# Altium PCB Project-PCB.PcbDoc
Units mm, origin at the board's own origin, x right, y up, seen from the top; angles counter-clockwise.
Board outline 100.33 x 75.18 mm, 2 copper layers (Top Layer, Bottom Layer), stack 1.59 mm thick; 14 components, 10 nets, 35 pads, 3 vias.
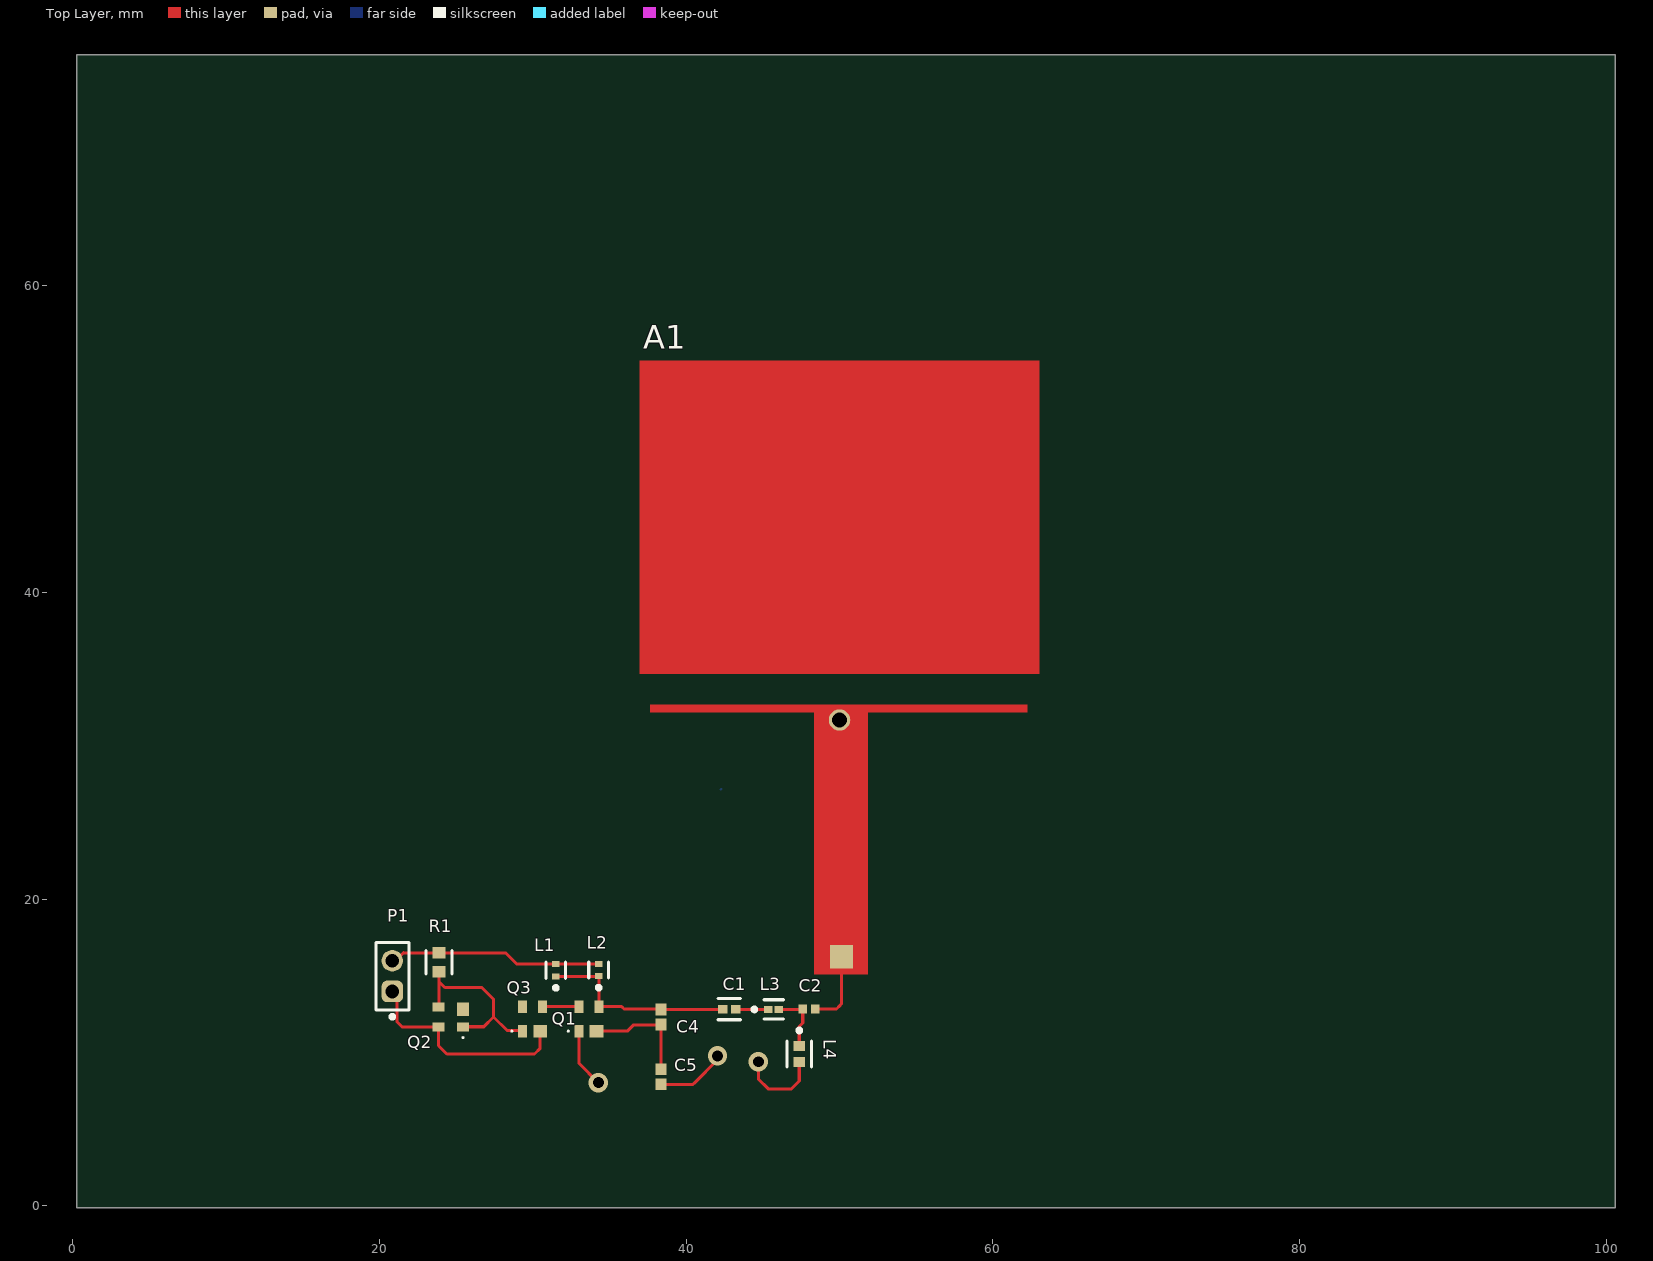
[diagram p0: Top Layer view]
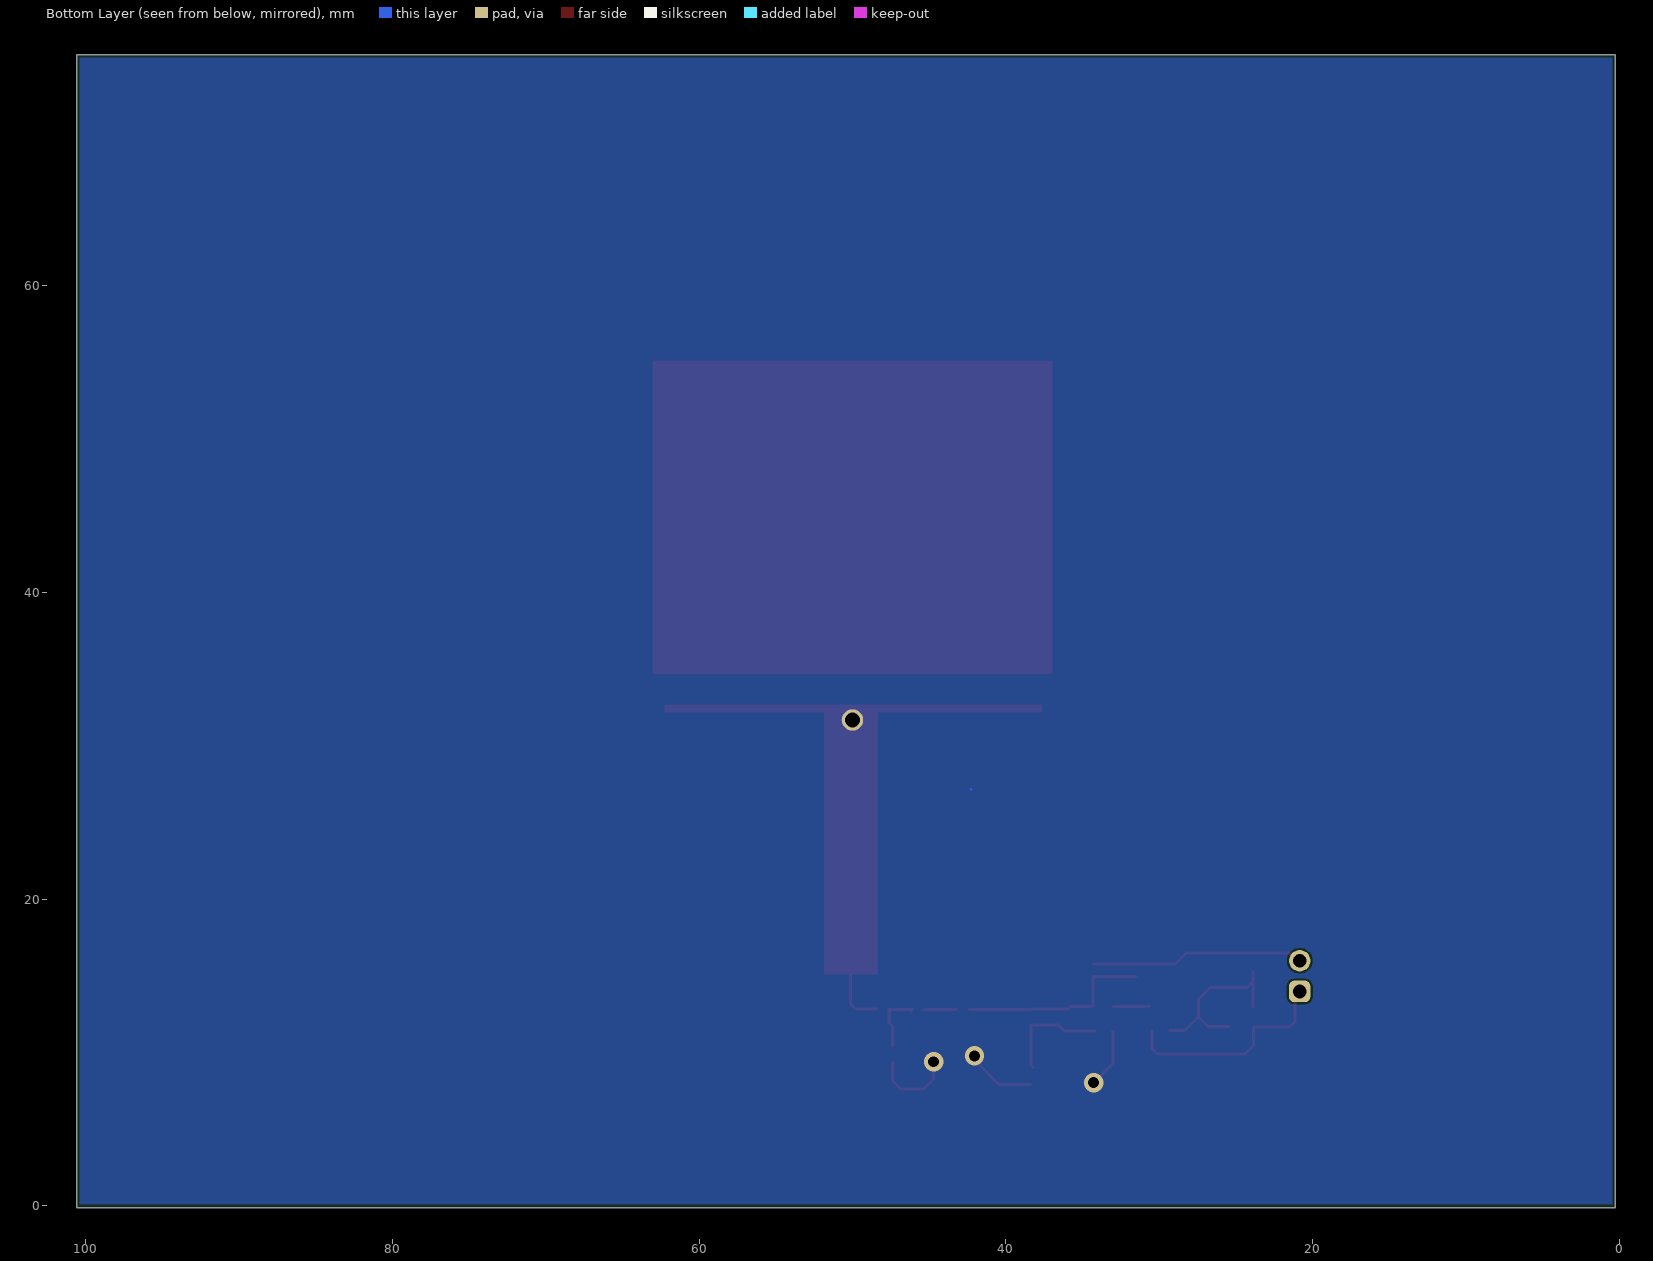
[diagram p1: Bottom Layer view, seen from below]
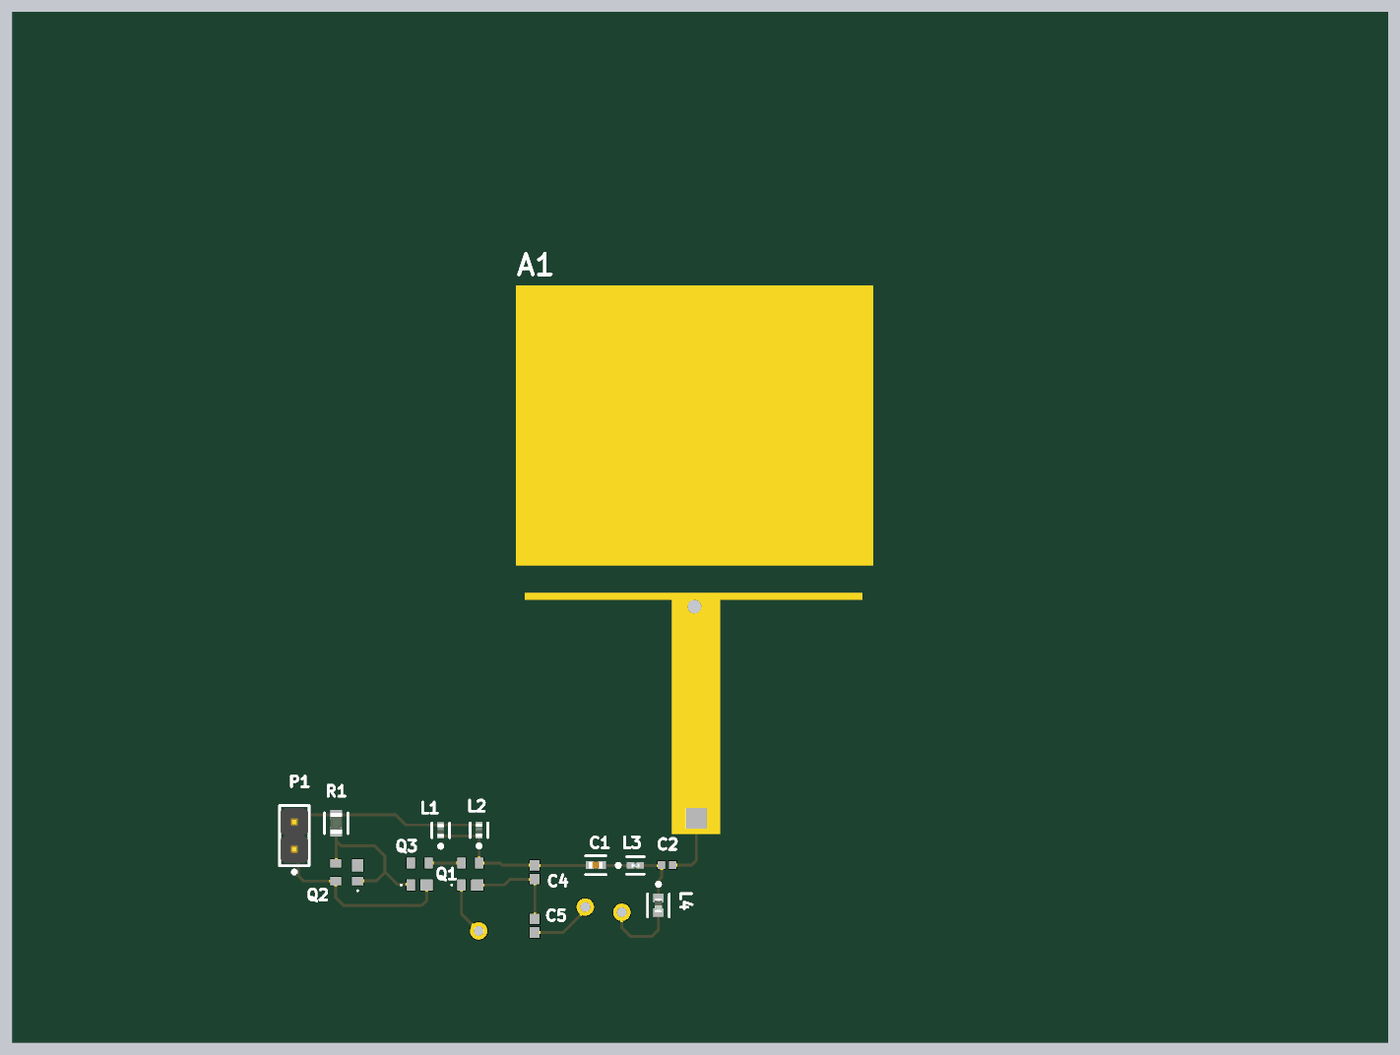
[diagram p2: 3D render of the assembled board from above, using the file's embedded part models]

## Layer stack, top to bottom
Top Solder: solder mask 0.0102, Solder Resist, Dk 3.5
Top Layer: signal copper 0.035
Dielectric 1: dielectric 1.52, RO4350B, Dk 4.8
Bottom Layer: signal copper 0.035
Bottom Solder: solder mask 0.0102, Solder Resist, Dk 3.5

## Board outline
0.254,-0.127 100.584,-0.127 100.584,75.057 0.254,75.057

## Design rules (kind name [scope] priority, off if disabled: settings)
BoardOutlineClearance [All] p1: gap=0.2 ignorepadtopadclearanceinfootprint=FALSE
Clearance [All] p1: gap=0.127 ignorepadtopadclearanceinfootprint=FALSE except(0.25: Arc-Hole Track-Hole SMDPad-Hole THPad-Hole Via-Hole Fill-Hole Poly-Hole Region-Hole Text-Hole)
ComponentClearance [All] p1: gap=0.127 collisioncheckmode=3 verticalgap=0.127 showdistances=TRUE
DiffPairsRouting [All] p1: maxlimit=0.254 minlimit=0.127 mostfreqgap=0.127 toplayer_minwidth=0.127 toplayer_maxwidth=25.4 toplayer_prefwidth=0.127 bottomlayer_minwidth=0.127 bottomlayer_maxwidth=25.4 bottomlayer_prefwidth=0.127 maxuncoupledlength=12.7
Height [All] p1: minheight=0 maxheight=1816.048 prefheight=12.7
HoleSize [All] p1: absolutevalues=TRUE maxlimit=6.3 minlimit=0.3 maxpercent=80.000 minpercent=20.000
HoleToHoleClearance [All] p1: gap=0.25 allowstackedmicrovias=FALSE
MinimumAnnularRing [All] p1: minimumring=0.076
MinimumSolderMaskSliver [All] p1: minsoldermaskwidth=0
PlaneClearance [All] p1: clearance=0.127
PlaneConnect PlaneConnectPowerPads [InPadClass('PowerPads')] p1: planeconnectstyle=Direct reliefexpansion=0.508 reliefentries=4 reliefconductorwidth=0.254 reliefairgap=0.254
PlaneConnect [All] p2: pad.planeconnectstyle=Relief pad.reliefexpansion=0.3 pad.reliefentries=4 pad.reliefconductorwidth=0.127 pad.reliefairgap=0.127 via.planeconnectstyle=Direct via.reliefexpansion=0.3 via.reliefentries=4 via.reliefconductorwidth=0.127 via.reliefairgap=0.127
PolygonConnect PolygonConnectPowerPads [All vs (InPadClass('PowerPads'))] p1: connectstyle=Direct reliefconductorwidth=0.254 reliefentries=4 polygonreliefangle="90 Angle" airgapwidth=0.254
PolygonConnect [All] p2: connectstyle=Direct reliefconductorwidth=0.127 reliefentries=4 polygonreliefangle="90 Angle" airgapwidth=0.127
RoutingVias [All] p1: holewidth=0.3 width=0.6 viastyle="Through Hole" minholewidth=0.3 minwidth=0.6 maxholewidth=0.6 maxwidth=6.6
SilkToSilkClearance [All] p1: silktosilkclearance=0
SilkToSolderMaskClearance [IsPad] p1: minsilkscreentomaskgap=0.127 clearancetoexposedcopper=TRUE
SolderMaskExpansion [All] p1: expansion=0.075 istentingtop=FALSE
SupplyNets "Schematic Supply Nets_2" [InNet('GND')] p1: voltage=0.000
SupplyNets "Schematic Supply Nets_1" [InNet('Vcc')] p2: voltage=0.000
SupplyNets "Schematic Supply Nets" [InNet('Vee')] p3: voltage=0.000
Width [All] p1: maxlimit=25.4 minlimit=0.127 preferedwidth=0.127 minimp=50.000000 maximp=50.000000 favimp=50.000000
20 further rules are at their usual default settings.

## Components (designator, comment, footprint, x,y, rotation, side; value= is the part's Value field where it differs from the comment)
A1 "CustomAntenna" CustomAntennaFootprint 50,44.942 r0 top net-tie
C1 "GRM1555C1H102FA01D" FP-GRM155-0_05-IPC_B 42.799,12.812 r0 top
C2 "04023J0R2PBSTR" CAPC1006X50X20LL10T10 48.006,12.827 r0 top
C4 "GRM1555C1H3R4WA01D" CAPC1005X55X25ML05T10 38.354,12.304 r90 top
C5 "GRM1555C1H3R4WA01D" CAPC1005X55X25ML05T10 38.354,8.4 r90 top
L1 "LQG15HN2N0B02D" FP-LQG15HH_02-MFG 31.496,15.352 r90 top
L2 "LQG15HN2N0B02D" FP-LQG15HH_02-MFG 34.29,15.367 r90 top
L3 "LQP03TN2N0B02D" FP-LQP03TG_02-IPC_A 45.693,12.798 r0 top
L4 "LQG15WZ10NG02D" FP-LQG15WH_02-IPC_A 47.371,9.891 r270 top
P1 "62000211121" 62000211121 20.828,14.971 r90 top
Q1 "BFP520" INF-SOT343_V 33.655,12.177 r90 top
Q2 "BFP520" INF-SOT343_V 24.638,12.304 r180 top
Q3 "BFP520" INF-SOT343_V 29.972,12.177 r90 top
R1 "CRCW06035K10FKEA" FP-CRCW0603-e3-IPC_C 23.876,15.875 r270 top

## Footprints (in the part's own frame and the unit in brackets; to place one, negate y for a bottom-side part, rotate by r counter-clockwise, add the part's x,y. Pads: shape width x height; smd on the part's side, far side on the other; paste and mask are expansions set on the pad)
62000211121 [mm] "Pin Header, pitch 2.00 mm, THT, Vertical, single row, 2p"
  rrect50% 1.4x1.4 hole 0.9: 1(-1,0)
  round 1.4 hole 0.9: 2(1,0)
  silkscreen extent -2.77,-1.07 2.2,1.07, body extent -2,-1 2,1, height 6.05
CAPC1005X55X25ML05T10 [mm] "Chip Capacitor, 2-Leads, Body 1.00x0.50mm, IPC Low Density"
  rect 0.76x0.72 smd: 1(-0.49,0) 2(0.49,0)
  body extent -0.53,-0.28 0.53,0.27, height 0.55
CAPC1006X50X20LL10T10 [mm] "Chip Capacitor, 2-Leads, Body 1.00x0.55mm, IPC High Density"
  rect 0.54x0.6 smd: 1(-0.41,0) 2(0.41,0)
  body extent -0.55,-0.33 0.55,0.33, height 0.5
CustomAntennaFootprint [mil]
  rect 60x60 smd: 1(5,-1130)
  round 60 on Top Solder: 1(5,-1130)
  round 55.12 hole 39.37: GND(0,-522.32)
  Top Layer region: -513.32,-404.22 513.33,-404.22 513.33,400.45 -513.32,400.45
  Top Layer region: -486.54,-502.65 482.01,-502.65 482.01,-482.96 -486.54,-482.96
  Top Layer region: 73.53,-1175.32 73.53,-488.77 -65.44,-488.77 -65.44,-1175.32
FP-CRCW0603-e3-IPC_C [mm]
  rect 0.735x0.862 smd paste+0 mask+0: 1(-0.615,0) 2(0.615,0)
  silkscreen extent -0.75,-0.85 0.75,0.85, body extent -1.08,-0.58 1.08,0.58, height 0.25
FP-GRM155-0_05-IPC_B [mm]
  rect 0.615x0.572 smd paste+0 mask+0: 1(-0.429,0) 2(0.429,0)
  silkscreen extent -0.74,-0.69 0.74,0.69, body extent -0.89,-0.44 0.89,0.44, height 0.25
FP-LQG15HH_02-MFG [mm]
  rect 0.4x0.5 smd paste+0 mask+0: 1(-0.4,0) 2(0.4,0)
  silkscreen extent -1.27,-0.64 0.53,0.65, body extent -0.7,-0.38 0.7,0.38, height 0.25
FP-LQG15WH_02-IPC_A [mm]
  rect 0.627x0.772 smd paste+0 mask+0: 1(-0.523,0) 2(0.523,0)
  silkscreen extent -1.66,-0.79 0.84,0.79, body extent -1.04,-0.59 1.04,0.59, height 0.25
FP-LQP03TG_02-IPC_A [mm]
  rect 0.554x0.463 smd paste+0 mask+0: 1(-0.354,0) 2(0.354,0)
  silkscreen extent -1.37,-0.63 0.63,0.63, body extent -0.83,-0.43 0.83,0.43, height 0.25
INF-SOT343_V [mm] "SOT343, 4-Leads, Body 2x1.25 mm"
  rect 0.8x0.6 smd: 1(-0.8,0.65) 3(0.8,-0.65) 4(0.8,0.65)
  rect 0.8x0.9 smd: 2(-0.8,-0.5)
  silkscreen extent -0.85,1.3 -0.75,1.4, body extent -0.63,-1 0.63,1, height 1

## Part data
A1: "Custom Antenna from CST"
C1: library part CMP-06035-003843-1, "Chip Multilayer Ceramic Capacitors for General Purpose, 0402, 1000pF, C0G, 30ppm/°C, 1%, 50V", Capacitance=1nF, Case Code (Imperial)=0402, Case Code (Metric)=1005, Dielectric=C0G, Max Operating Temperature=125°C, Min Operating Temperature=-55°C, Package Quantity=1, Tolerance=1%, Voltage=50V, Case/Package=0402, Depth=0.5mm, Height=0.5mm, Lead Free="Lead Free", Length=1mm, Material=Ceramic, Mount="Surface Mount", Packaging="Tape and Reel", Radiation Hardening=No, REACH SVHC="No SVHC", Termination=SMD/SMT, Thickness=0.022inch, Voltage Rating=50V, Voltage Rating (DC)=50V, Width=0.02inch
C2: library part CMP-2008-04702-1, Manufacturer="AVX Interconnect / Elco", Part Number=04023J0R2PBSTR
C4 C5: library part CMP-1034-00271-2, Manufacturer=Murata, Part Number=GRM1555C1H3R4WA01D
L1 L2: library part CMP-06042-001124-1, "Multilayer type RF Inductor 2nH ±0.1nH 0.09Ω 900mA 0402"
L3: library part CMP-06042-013297-1, "Film type RF Inductor 2nH ±0.1nH 600mA 0.15Ω 0201 (0603)", Case Code (Imperial)=0201, Case Code (Metric)=0603, Current=400mA, Current Rating=600mA, DC Resistance (DCR)=150mR, Inductance=2nH, Max Operating Temperature=125°C, Min Operating Temperature=-55°C, Package Quantity=15000, Resistor Type="Thin Film", Self Resonant Frequency=12.5GHz, Test Frequency=500MHz, Case/Package=0201, Core Material=Non-Magnetic, DC Current=600mA, Depth=0.33mm, Height=0.3mm, Height - Seated (Max)=0.013inch, Length=0.6mm, Max DC Current=600mA, Military Standard=Not, Mount="Surface Mount", Packaging="Tape and Reel", Q Factor=14, REACH SVHC="No SVHC", Shielding=Unshielded, Termination=SMD/SMT, Width=0.012inch
L4: library part CMP-06042-006093-1, "Multilayer type Inductor for Automotive 10nH ±2% 0.19Ω 500mA 0402"
P1: library part CMP-1502-00956-4, Contact Resistance=20mΩ, Current Rating=2A, Max Operating Temperature=105°C, Min Operating Temperature=-40°C, Operating Supply Voltage=200V, Contact Material=Gold, Gender=Male, Height=6.35mm, Lead Pitch=2mm, NexarPartId=61924778, Number of Contacts=2, Number of Pins=2, Number of Rows=1, Orientation=Vertical, RoHS=Non-Compliant, Voltage Rating=200V
Q1 Q2 Q3: library part CMP-1202-00001-1, "NPN Silicon RF Transistor, 2.5 V VCEO, 40 mA IC, 23.5 dB Gmax, SOT343, Green", Manufacturer=Infineon, ComponentLink1Description="Manufacturer URL", ComponentLink1URL=http://www.infineon.com/, ComponentLink2Description=Datasheet, ComponentLink2URL=http://www.infineon.com/dgdl/bfp520.pdf?folderId=db3a30431400ef68011425b291f205c5&fileId=db3a30431400ef680114275a86cd0745&location=en.Products.RF.RF_Transistors_.Low_Noise_Si_Transistors_up_to_5_GHz_.DATASHEET.bfp520.pdf, ComponentLink3Description="Package Specification", ComponentLink3URL=http://www.infineon.com/dgdl/SOT343-Package_Overview.pdf?folderId=db3a30431936bc4b0119535155343cba&fileId=db3a30431936bc4b0119535a9f393cd3, DatasheetVersion=Aug-2010, Gmax (typ)="23.5 dB", Green=yes, Halogen-free=yes, IC (max)="40 mA", Mounting Technology="Surface Mount", NFmin (typ)="0.95 dB", PackageDescription="4-Pin Small Outline Transistor Package, 1.25 x 2 mm Body", PackageReference=SOT343, PartNumber=BFP520, Ptot (max)="100 mW", VCEO (max)="2.5 V"
R1: library part CMP-1012-00590-3, "RES Thick Film, 5.1kΩ, 1%, 0.1W, 100ppm/°C, 0603", Case Code (Imperial)=0603, Case Code (Metric)=1608, Max Operating Temperature=155°C, Min Operating Temperature=-55°C, Package Quantity=5000, Power Rating=100mW, Resistance=5.1kR, Temperature Coefficient=100ppm/°C, Tolerance=1%, Voltage Rating=75V, Case/Package=0603, Composition="Thick Film", Contact Plating=Tin, Depth=0.85mm, Height=0.45mm, Lead Free="Lead Free", Length=1.55mm, Military Standard=Not, Mount="Surface Mount", Packaging="Tape and Reel", Radiation Hardening=No, Termination=SMD/SMT, Voltage Rating (DC)=75V, Weight=7.1E-05oz, Width=0.85mm

## Via types
v1: diameter 1.27, hole 0.711, Top Layer to Bottom Layer, 3 vias

## Nets (pads, with @x,y where several pads share a name; then routed paths per layer and width w, separated by ;. In a path a pad name is that pad's centre, name@x,y a point inside that pad or via, vN(x,y) a via of type N, cw(c..) or ccw(c..) an arc to the next point about the centre after c; other vN are vias at no path point)
GND: A1.GND C5.1 L4.2 Q1.1 | length 14.1
  Top Layer w0.2: Q1.1@33.02,11.362 Q1.1 33.005,9.286 v1(34.269,8.022) ; C5.1 40.437,7.91 40.549,8.022 42.037,9.51 v1(42.037,9.764) ; v1(44.704,9.383) 44.704,8.255 45.339,7.62 46.863,7.62 47.371,8.128 L4.2
  Bottom Layer w0.127: 42.244,27.136 42.249,27.136 42.291,27.178
NetA1_1: A1.1@50.127,16.24 C2.2 | length 5
  Top Layer w0.2: C2.2@48.416,12.857 C2.2 49.794,12.827 50.01,13.043 50.127,13.16 A1.1@50.127,16.24
NetC1_1: C1.1 C4.2 L1.1 L2.1 Q1.3 | length 12.8
  Top Layer w0.2: L1.1 34.275,14.952 L2.1 ; L2.1@34.271,14.844 34.305,14.81 Q1.3 35.791,12.977 35.941,12.827 38.321,12.827 C4.2 42.352,12.794 C1.1
NetC1_2: C1.2 L3.1 | length 2.1
  Top Layer w0.2: C1.2 43.242,12.798 L3.1
NetC2_1: C2.1 L3.2 L4.1 | length 4.2
  Top Layer w0.127: 47.533,11.846 47.596,11.909 ; C2.1@47.567,12.798 C2.1
  Top Layer w0.2: L3.2@46.146,12.7 L3.2 C2.1@47.567,12.798 ; L4.1 47.371,11.684 47.533,11.846 ; 47.596,11.909 C2.1
NetC4_1: C4.1 C5.2 Q1.2 | length 7.2
  Top Layer w0.2: Q1.2 36.157,11.377 36.574,11.794 38.334,11.794 C4.1 38.354,9.129 C5.2@38.227,9.002
NetQ1_4: Q1.4 Q3.3 | length 2.4
  Top Layer w0.2: Q3.3 Q1.4
NetQ2_1: Q2.1 Q2.3 Q3.1 R1.2 | length 12
  Top Layer w0.2: Q2.3 23.876,12.992 23.876,14.605 ; R1.2 23.876,14.605 ; Q2.1 25.453,11.669 26.797,11.669 27.432,12.304 ; Q3.1 29.281,11.418 28.319,11.418 27.432,12.304 ; 23.876,14.605 24.257,14.224 26.67,14.224 27.432,13.462 27.432,12.939 27.432,12.304
Vcc: L1.2 L2.2 P1.2 R1.1 | length 14
  Top Layer w0.2: P1.2 21.021,15.971 21.554,16.504 21.568,16.49 R1.1 28.214,16.49 28.956,15.748 31.492,15.748 L1.2 34.275,15.752 L2.2
Vee: P1.1 Q2.4 Q3.2 | length 14.3
  Top Layer w0.2: P1.1 21.12,13.679 21.12,12.012 21.478,11.654 Q2.4 23.838,10.437 24.384,9.891 30.099,9.891 30.472,10.264 Q3.2
pads on no net: A1.1@50.127,16.24 Q2.2 Q3.4

## Polygon pours and split planes (outlines as drawn)
GND on Bottom Layer "GND_L02_P000" (solid, remove dead copper, pour order 0): 0.254,-0.127 100.584,-0.127 100.584,75.057 0.254,75.057